# Altium PCB adc-breakout.PcbDoc
Units mil, origin at the board's own origin, x right, y up, seen from the top; angles counter-clockwise.
Board outline 2058.58 x 1965.67 mil, 2 copper layers (Top Layer, Bottom Layer), stack 65.792 mil thick; 49 components, 44 nets, 182 pads, 51 vias.
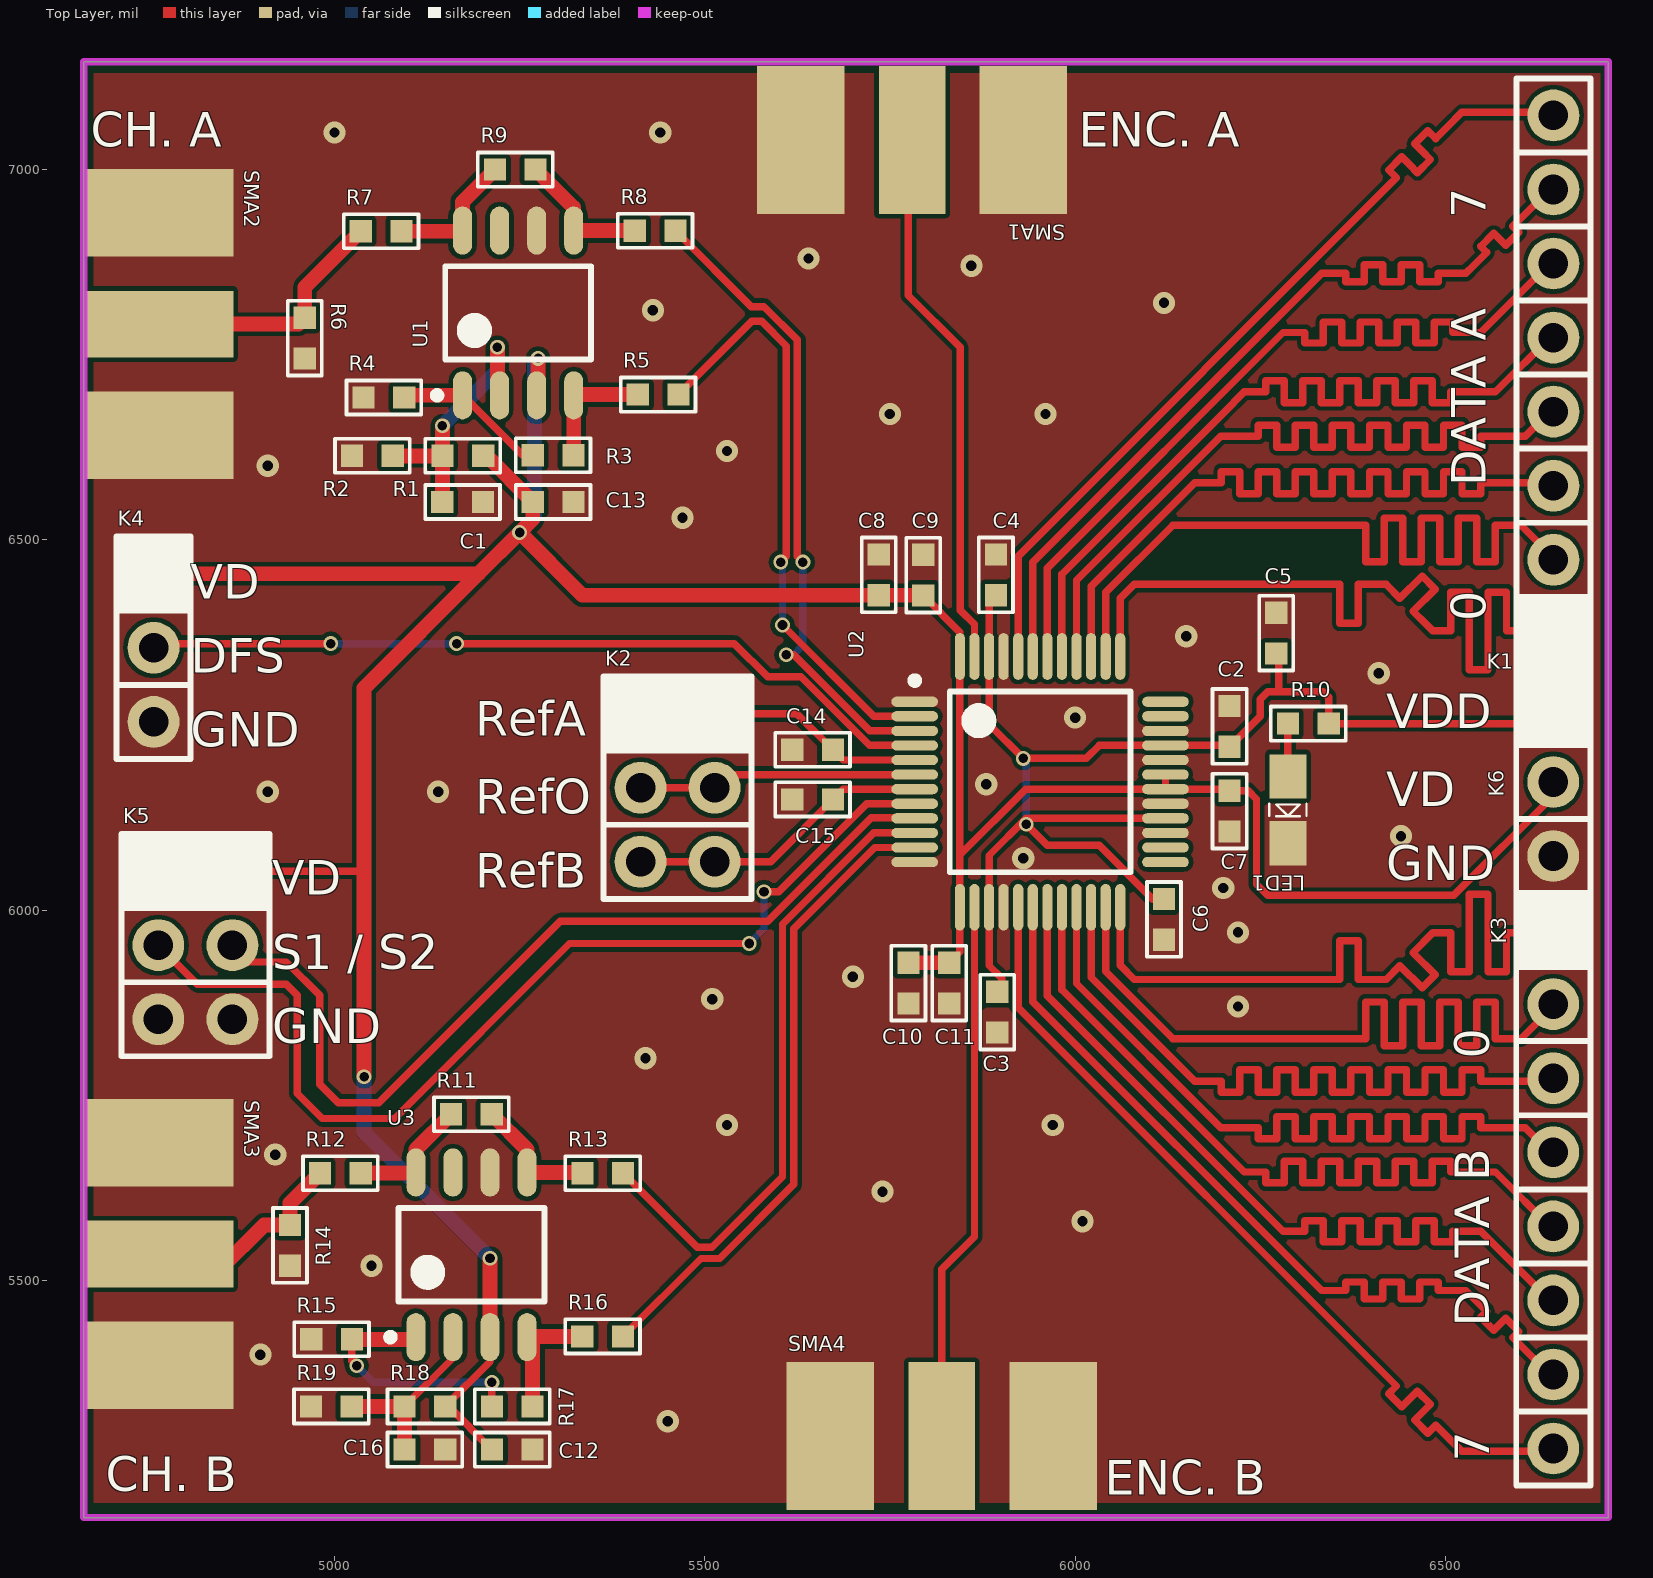
[diagram p0: Top Layer view]
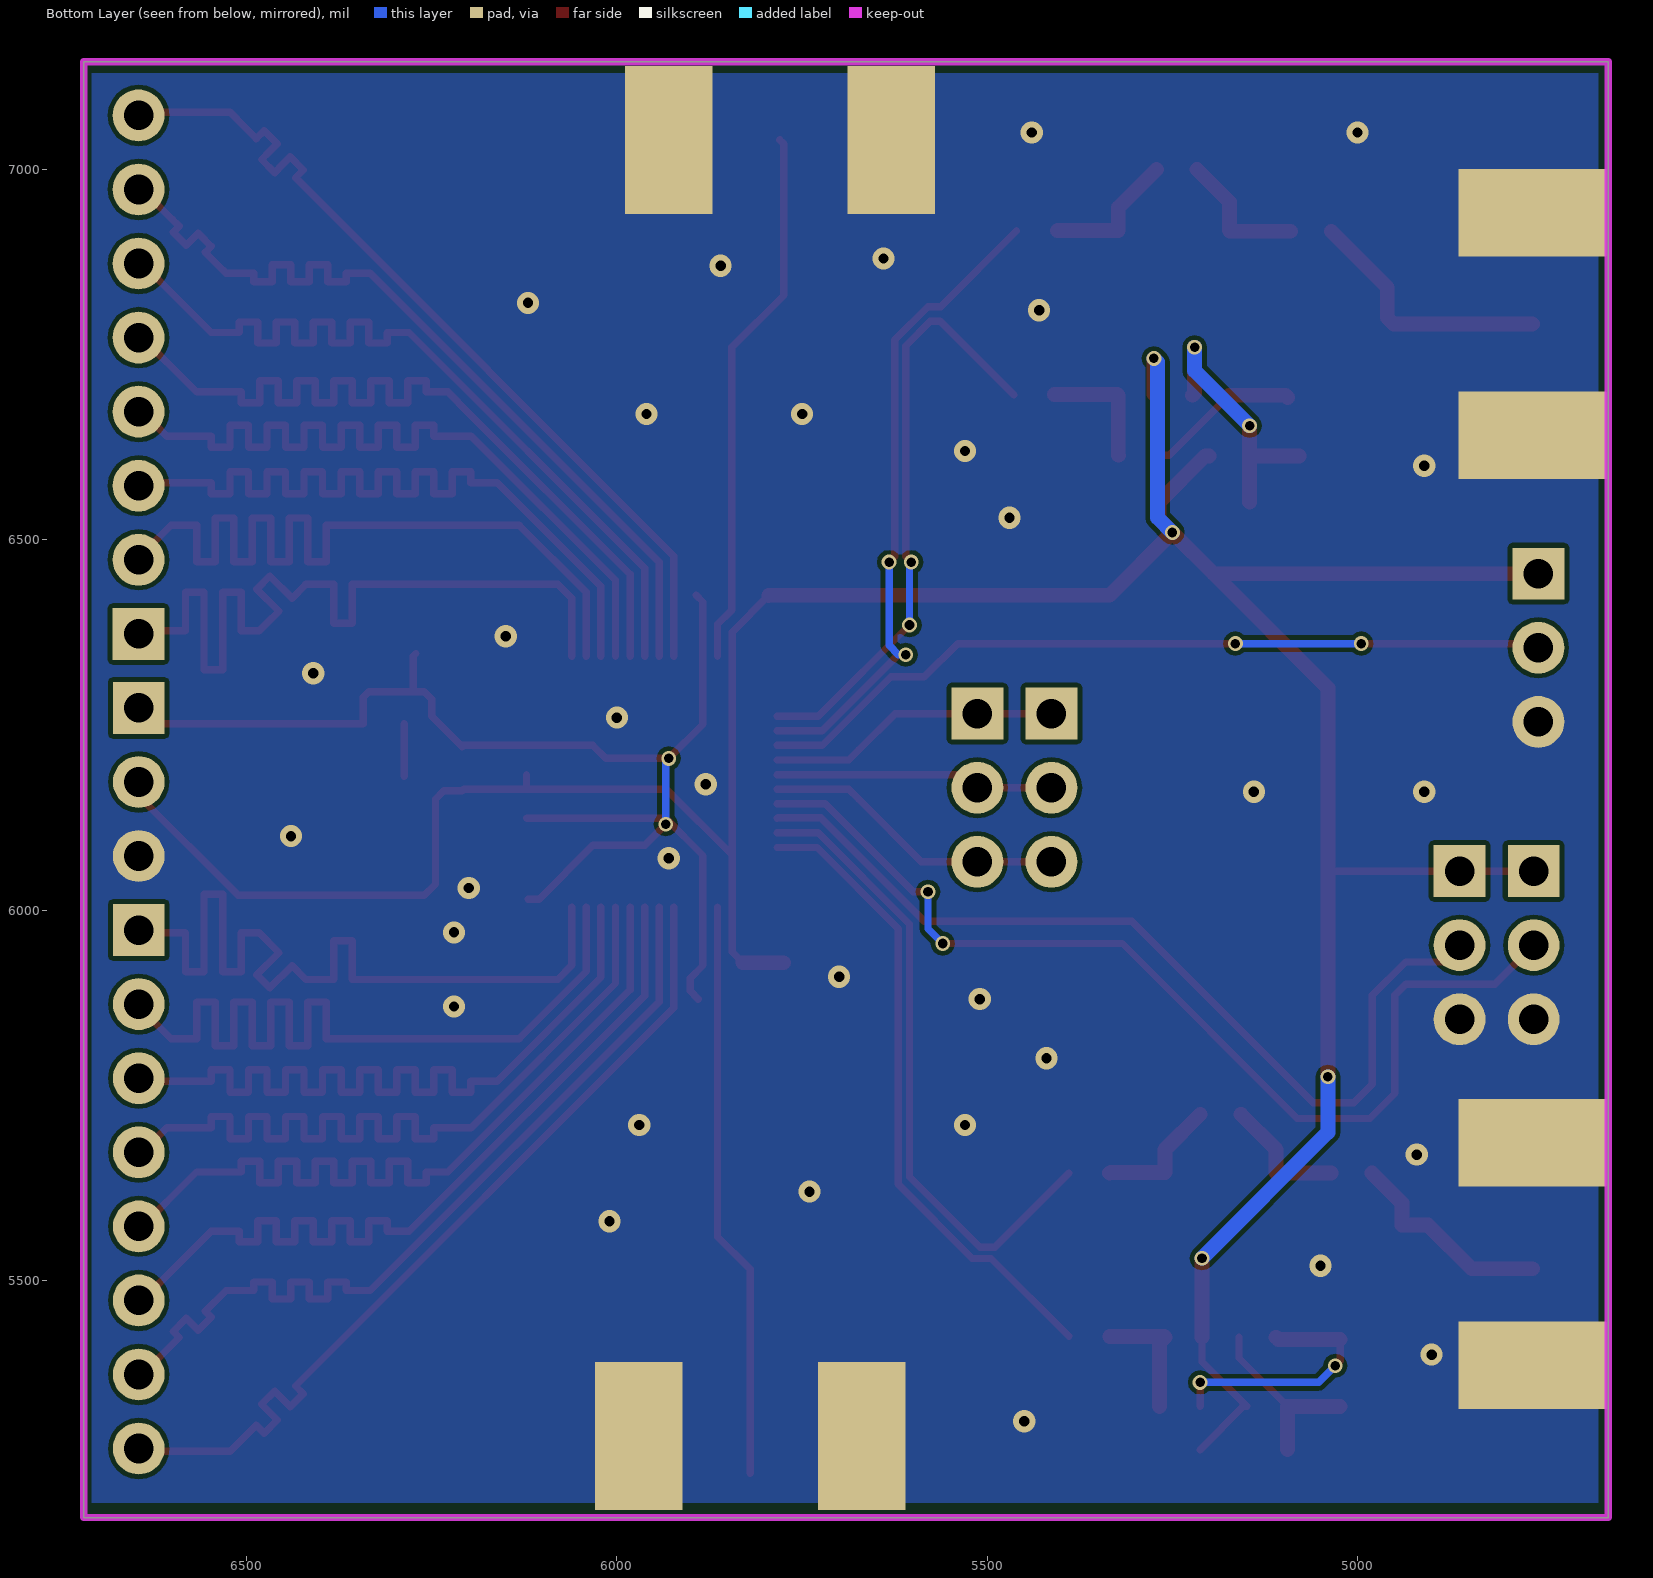
[diagram p1: Bottom Layer view, seen from below]

## Layer stack, top to bottom
Top Solder: solder mask 0.4, Solder Resist, Dk 3.5
Top Layer: signal copper 1.4
Dielectric 1: dielectric 62.9921, FR-4, Dk 4.8
Bottom Layer: signal copper 1.4
Bottom Solder: solder mask 0.4, Solder Resist, Dk 3.5

## Board outline
4661.42,5180 6720,5180 6720,7145.67 4661.42,7145.67

## Design rules (kind name [scope] priority, off if disabled: settings)
Clearance [All] p1: gap=6 ignorepadtopadclearanceinfootprint=FALSE except(0: Arc-Hole Track-Hole SMDPad-Hole THPad-Hole Via-Hole Fill-Hole Poly-Hole Region-Hole Text-Hole)
HoleSize [All] p1: absolutevalues=TRUE maxlimit=248.03 minlimit=39.37 maxpercent=80.000 minpercent=20.000
PlaneConnect [All] p1: planeconnectstyle=Direct reliefexpansion=20 reliefentries=4 reliefconductorwidth=10 reliefairgap=10
PolygonConnect [All] p1: connectstyle=Direct reliefconductorwidth=10 reliefentries=4 polygonreliefangle="90 Angle" airgapwidth=10
RoutingVias [All] p1: holewidth=13 width=20 viastyle="Through Hole" minholewidth=13 minwidth=20 maxholewidth=60 maxwidth=60
SolderMaskExpansion [All] p1: expansion=4
Width [All] p1: maxlimit=1000 minlimit=4 preferedwidth=10
28 further rules are at their usual default settings.

## Components (designator, comment, footprint, x,y, rotation, side; value= is the part's Value field where it differs from the comment)
C1 "100nF" 0603C-GENERIC 5145.67,6551.18 r0 top
C2 "1nF" 0603C-GENERIC 6208.66,6275.59 r270 top
C3 "1nF" 0603C-GENERIC 5895,5835 r90 top
C4 "1nF" 0603C-GENERIC 5893.07,6480.31 r270 top
C5 "1nF" 0603C-GENERIC 6271.65,6401.57 r270 top
C6 "1nF" 0603C-GENERIC 6120,5960 r90 top
C7 "1nF" 0603C-GENERIC 6208.66,6106.42 r90 top
C8 "1nF" 0603C-GENERIC 5735,6480.2 r270 top
C9 "1nF" 0603C-GENERIC 5795,6480 r270 top
C10 "1nF" 0603C-GENERIC 5774.96,5874.13 r90 top
C11 "1nF" 0603C-GENERIC 5830.08,5874.13 r90 top
C12 "100nF" 0603C-GENERIC 5212.6,5271.65 r0 top
C13 "100nF" 0603C-GENERIC 5267.83,6551.18 r0 top
C14 "100nF" 0603C-GENERIC 5618.23,6216.54 r0 top
C15 "100nF" 0603C-GENERIC 5618.23,6149.61 r0 top
C16 "100nF" 0603C-GENERIC 5094.61,5271.65 r0 top
K1 "HEADER-1X8" HEADER-1X8 6645.88,6373.11 r180 top
K2 "HEADER-2X3" HEADER-2X3 5413.39,6265.35 r0 top
K3 "HEADER-1X8" HEADER-1X8 6645.67,5973.11 r0 top
K4 "HEADER-1X3" HEADER-1X3 4755.91,6454.33 r0 top
K5 "HEADER-2X3" HEADER-2X3 4762.2,6052.76 r0 top
K6 "HEADER-1X3" HEADER-1X3 6645.67,6273.11 r0 top
LED1 "Green" "0805LED - GREEN" 6287.4,6135.55 r270 top
R1 "10K" 0603R-10K 5200.79,6613.46 r180 top
R2 "10K" 0603R-10K 5078.62,6613.46 r180 top
R3 "499R" 0603R-GENERIC 5267.83,6614.17 r0 top
R4 "523R" 0603R-GENERIC 5039.37,6692.2 r0 top
R5 "49R9" 0603R-GENERIC 5409.45,6696.14 r0 top
R6 "49R9" 0603R-GENERIC 4960,6800 r270 top
R7 "499R" 0603R-GENERIC 5035.55,6916.61 r0 top
R8 "49R9" 0603R-GENERIC 5405.51,6917.32 r0 top
R9 "499R" 0603R-GENERIC 5216.65,7000 r0 top
R10 "220R" 0603R-220 6342.4,6251.97 r180 top
R11 "499R" 0603R-GENERIC 5157.48,5724.41 r0 top
R12 "499R" 0603R-GENERIC 4980.43,5644.96 r0 top
R13 "49R9" 0603R-GENERIC 5334.76,5644.96 r0 top
R14 "49R9" 0603R-GENERIC 4940,5575 r270 top
R15 "523R" 0603R-GENERIC 4968.62,5420.55 r0 top
R16 "49R9" 0603R-GENERIC 5334.65,5424.49 r0 top
R17 "499R" 0603R-GENERIC 5212.6,5330 r0 top
R18 "10K" 0603R-10K 5149.61,5330 r180 top
R19 "10K" 0603R-10K 5023.5,5330 r180 top
SMA1 "*" MOLEX_SMA_EDGE 5610,7040 r270 top
SMA2 "*" MOLEX_SMA_EDGE 4763.78,6621.34 r0 top
SMA3 "*" MOLEX_SMA_EDGE 4763.78,5365.75 r0 top
SMA4 "*" MOLEX_SMA_EDGE 5990,5290 r90 top
U1 "AD8138" AD8138-SOIC8 5248.03,6806.38 r90 top
U2 "AD9288-(40/60/80)" ad9288-48QFP 5952.76,6173.23 r0 top
U3 "AD8138" AD8138-SOIC8 5185.04,5534.72 r90 top

## Footprints (in the part's own frame and the unit in brackets; to place one, negate y for a bottom-side part, rotate by r counter-clockwise, add the part's x,y. Pads: shape width x height; smd on the part's side, far side on the other; paste and mask are expansions set on the pad)
0603C-GENERIC [mil] "CAPACITOR 0603"
  rect 30x30 smd: 1(0,0) 2(55,0)
  silkscreen extent -23,-23 78,23, body extent -4,-15 59,15, height 19
0603R-10K [mil] "RESISTOR 0603"
  rect 30x30 smd: 1(0,0) 2(55,0)
  silkscreen extent -23,-23 78,23, body extent -4,-15 59,15, height 20
0603R-220 [mil] "RESISTOR 0603"
  rect 30x30 smd: 1(0,0) 2(55,0)
  silkscreen extent -23,-23 78,23, body extent -4,-15 59,15, height 20
0603R-GENERIC [mil] "RESISTOR 0603"
  rect 30x30 smd: 1(0,0) 2(55,0)
  silkscreen extent -23,-23 78,23, body extent -4,-15 59,15, height 19
"0805LED - GREEN" [mil]
  rect 60x50 smd: A(-45,0) K(45,0)
  silkscreen extent -8,-25 9,25, body extent -45,-25 41,25, height 24
AD8138-SOIC8 [mm] "SOIC, 8-Leads, Body 4.90x3.90mm, Pitch 1.27mm, IPC Low Density"
  oval 1.65x0.65 smd: 1(-2.825,1.905) 2(-2.825,0.635) 3(-2.825,-0.635) 4(-2.825,-1.905) 5(2.825,-1.905) 6(2.825,-0.635) 7(2.825,0.635) 8(2.825,1.905)
  silkscreen extent -2.95,-2.5 1.6,2.9, body extent -3,-2.5 3,2.5, height 1.35
ad9288-48QFP [mm] "TSQFP, 48-Leads, Body 7.00x7.00mm, Pitch 0.50mm, IPC Low Density"
  oval 1.6x0.35 smd: 1(-4.3,2.75) 2(-4.3,2.25) 3(-4.3,1.75) 4(-4.3,1.25) 5(-4.3,0.75) 6(-4.3,0.25) 7(-4.3,-0.25) 8(-4.3,-0.75) 9(-4.3,-1.25) 10(-4.3,-1.75) 11(-4.3,-2.25) 12(-4.3,-2.75) 25(4.3,-2.75) 26(4.3,-2.25) 27(4.3,-1.75) 28(4.3,-1.25) 29(4.3,-0.75) 30(4.3,-0.25) 31(4.3,0.25) 32(4.3,0.75) 33(4.3,1.25) 34(4.3,1.75) 35(4.3,2.25) 36(4.3,2.75)
  oval 0.35x1.6 smd: 13(-2.75,-4.3) 14(-2.25,-4.3) 15(-1.75,-4.3) 16(-1.25,-4.3) 17(-0.75,-4.3) 18(-0.25,-4.3) 19(0.25,-4.3) 20(0.75,-4.3) 21(1.25,-4.3) 22(1.75,-4.3) 23(2.25,-4.3) 24(2.75,-4.3) 37(2.75,4.3) 38(2.25,4.3) 39(1.75,4.3) 40(1.25,4.3) 41(0.75,4.3) 42(0.25,4.3) 43(-0.25,4.3) 44(-0.75,4.3) 45(-1.25,4.3) 46(-1.75,4.3) 47(-2.25,4.3) 48(-2.75,4.3)
  silkscreen extent -4.42,-3.1 3.1,3.6, body extent -4.5,-4.5 4.5,4.5, height 1.6
HEADER-1X3 [mil]
  rect 70x70 hole 40: 1(0,0)
  round 70 hole 40: 2(0,-100) 3(0,-200)
  silkscreen extent -50,-250 50,50, body extent -50,-250 50,50, height 470
HEADER-1X8 [mil]
  rect 70x70 hole 40: 1(0,0)
  round 70 hole 40: 2(0,-100) 3(0,-200) 4(0,-300) 5(0,-400) 6(0,-500) 7(0,-600) 8(0,-700)
  silkscreen extent -50,-750 50,50, body extent -50,-750 50,50, height 470
HEADER-2X3 [mil]
  rect 70x70 hole 40: 1(0,0) 2(100,0)
  round 70 hole 40: 3(0,-100) 4(100,-100) 5(0,-200) 6(100,-200)
  silkscreen extent -50,-250 150,50, body extent -50,-250 150,50, height 470
MOLEX_SMA_EDGE [mm]
  rect 5.08x2.286 smd: 1(0,4.318)
  rect 5.08x3 all layers, no hole: 2(0,8.136) 2(0,0.5)
  body extent -12.24,-0.44 2.03,9.08, height 4.32

## Part data
C1 C12 C13 C14 C15 C16: library part 0603C-100NF-25V-X7R-TDK, "CAPACITOR 0603 CERAMIC", Manufacturer="TDK Corporation", Manufacturer Part Number=C1608X7R1E104K, Supplier Part Number 1=445-1316-2-ND, Reel=C12, Supplier 1=Digi-Key
C2 C3 C4 C5 C6 C7 C8 C9 C10 C11: library part 0603C-1NF-50V-X7R, "CAPACITOR 0603 CERAMIC"
K1 K3 K4 K6: Supplier Part Number 1=S1011E-36-ND, Supplier 1=Digi-Key
K2 K5: Supplier Part Number 1=OR1081-ND, Supplier 1=Digi-Key
LED1: library part "0805 SMD LED - GREEN", Supplier Part Number 1=160-1426-1-ND, Supplier 1=Digi-Key
R1 R2 R18 R19: library part 0603R-10K, "GENERIC RESISTOR 0603", Case="0603 (1608 metric)", Manufacturer="Stackpole Electronics Inc", Manufacturer Part Number="RMCF 1/16 10K 1% R", Power (Watts)="0.1W, 1/10W", Resistance In Ohms=10.0K, Supplier Part Number=RMCF1/1610KFRDKR-ND, Supplier Part Number 1=RMCF0603FT10K0DKR-ND, Temperature Coefficient=±100ppm/°C, Tolerance=±1%, Category=Resistors, Composition="Thick Film", Lead Style="Surface Mount (SMD - SMT)", Packaging=Digi-Reel®, Reel=R21, RoHS="RoHS Compliant", Supplier=Digi-Key, Supplier 1=Digi-Key
R3 R4 R7 R9 R11 R12 R15 R17: library part 0603R-499R, "GENERIC RESISTOR 0603", Supplier Part Number 1=RNCP0603FTD499RTR-ND, Supplier 1=Digi-Key
R5 R6 R8 R13 R14 R16: library part 0603R-49R9, "GENERIC RESISTOR 0603", Supplier Part Number 1=RMCF0603FT49R9TR-ND, Supplier 1=Digi-Key
R10: library part 0603R-220, "GENERIC RESISTOR 0603", Case="0603 (1608 metric)", Manufacturer="Stackpole Electronics Inc", Manufacturer Part Number="RMCF 1/16 220 1% R", Power (Watts)="0.1W, 1/10W", Resistance In Ohms=220, Supplier Part Number=RMCF1/16220FRCT-ND, Temperature Coefficient=±100ppm/°C, Tolerance=±1%, Category=Resistors, Composition="Thick Film", Lead Style="Surface Mount (SMD - SMT)", Packaging="Cut Tape (CT)", RoHS="RoHS Compliant", Supplier=Digi-Key, Supplier 1=Digi-Key, Supplier Part Number 1=RMCF1/16220FRCT-ND
SMA1 SMA2 SMA3 SMA4: library part MOLEX_SMA_EDGE, Supplier Part Number 1=WM5534-ND, Supplier 1=Digi-Key
U1 U3: Supplier Part Number 1=AD8138ARZ-R7CT-ND, Supplier 1=Digi-Key
U2: library part AD9288, Supplier Part Number 1=AD9288BSTZ-40-ND, Supplier 1=Digi-Key

## Via types
v1: diameter 30, hole 14, Top Layer to Bottom Layer, tented both sides, 33 vias
v2: diameter 20, hole 13, Top Layer to Bottom Layer, tented both sides, 18 vias

## Nets (pads, with @x,y where several pads share a name; then routed paths per layer and width w, separated by ;. In a path a pad name is that pad's centre, name@x,y a point inside that pad or via, vN(x,y) a via of type N, cw(c..) or ccw(c..) an arc to the next point about the centre after c; other vN are vias at no path point)
DFS: K4.2 U2.4 | length 1086.9
  Top Layer w10: K4.2 4761.57,6360 v2(4995,6360) ; v2(5165,6360) 5540,6360 5585,6315 5630,6315 5722.56,6222.44 U2.4
  Bottom Layer w10: v2(4995,6360) v2(5165,6360)
GND: C1.2 C2.1 C3.1 C4.1 C5.1 C6.1 C7.1 C8.1 C9.1 C10.1 C11.1 C12.2 C13.2 C14.1 C15.1 C16.2 K4.3 K5.5 K5.6 K6.3 LED1.K R2.2 R4.1 R6.2 R14.2 R15.1 R19.2 SMA1.2 SMA2.2 SMA3.2 SMA4.2 U1.6 U2.1 U2.12 U2.16 U2.27 U2.29 U2.32 U2.34 U2.45 U3.6
  other v1: 5450,5310 4900,5400 5050,5520 6010,5580 5740,5620 4920,5670 5530,5710 5970,5710 5420,5800 6220,5870 5510,5880 5700,5910 6220,5970 6200,6030 5930,6070 6440,6100 4910,6160 5140,6160 5880,6170 6000,6260 6410,6320 6150,6370 5470,6530 4910,6600 5530,6620 5750,6670 5960,6670 5430,6810 6120,6820 5860,6870 5640,6880 5000,7050 5440,7050
NetC1_1: C1.1 R1.2 R2.1 U1.2 | length 372.9
  Top Layer w20: R2.1 R1.2 ; C1.1 5145.79,6551.3 R1.2 ; v2(5145.79,6654.21) R1.2 ; v2(5220,6760) 5220,6698.19 U1.2
  Bottom Layer w20: v2(5145.79,6654.21) 5220,6728.43 v2(5220,6760)
NetC16_1: C16.1 R18.2 R19.1 U3.2 | length 250.1
  Top Layer w10: R18.2 5160.04,5395.43 U3.2
  Top Layer w20: R19.1 R18.2 C16.1
NetK1_1: K1.1 U2.37 | length 1200
  Top Layer w10: U2.37 6061.02,6421.02 6080,6440 6260,6440 6357.5,6440 6357.5,6387.61 6382.5,6387.61 6382.5,6440 6407.5,6440 6420,6440 6420.96,6439.04 6438.64,6421.36 6468.55,6451.27 6486.23,6433.59 6456.32,6403.68 6474,6386 6482.83,6377.17 6507.5,6377.17 6507.5,6429.56 6532.5,6429.56 6532.5,6377.17 6532.5,6324.77 6557.5,6324.77 6557.5,6377.17 6557.5,6429.56 6582.5,6429.56 6582.5,6377.17 6607.5,6377.17 6620,6377.17 K1.1@6644.88,6377.17
NetK1_2: K1.2 U2.38 | length 1200
  Top Layer w10: U2.38 6041.34,6429.18 6132.16,6520 6140,6520 6392.5,6520 6392.5,6470.4 6417.5,6470.4 6417.5,6520 6417.5,6529.6 6442.5,6529.6 6442.5,6520 6442.5,6470.4 6467.5,6470.4 6467.5,6520 6467.5,6529.6 6492.5,6529.6 6492.5,6520 6492.5,6470.4 6517.5,6470.4 6517.5,6520 6517.5,6529.6 6542.5,6529.6 6542.5,6520 6542.5,6470.4 6567.5,6470.4 6567.5,6520 6580,6520 6602.05,6520 K1.2@6644.88,6477.17
NetK1_3: K1.3 U2.39 | length 1196
  Top Layer w10: U2.39 6021.65,6437.33 6160,6575.68 6161.49,6577.17 6172.5,6577.17 6197.5,6577.17 6197.5,6592.17 6222.5,6592.17 6222.5,6577.17 6222.5,6562.17 6247.5,6562.17 6247.5,6577.17 6247.5,6592.17 6272.5,6592.17 6272.5,6577.17 6272.5,6562.17 6297.5,6562.17 6297.5,6577.17 6297.5,6592.17 6322.5,6592.17 6322.5,6577.17 6322.5,6562.17 6347.5,6562.17 6347.5,6577.17 6347.5,6592.17 6372.5,6592.17 6372.5,6577.17 6372.5,6562.17 6397.5,6562.17 6397.5,6577.17 6397.5,6592.17 6422.5,6592.17 6422.5,6577.17 6422.5,6562.17 6447.5,6562.17 6447.5,6577.17 6447.5,6592.17 6472.5,6592.17 6472.5,6577.17 6472.5,6562.17 6497.5,6562.17 6497.5,6577.17 6497.5,6592.17 6522.5,6592.17 6522.5,6577.17 6522.5,6562.17 6547.5,6562.17 6547.5,6577.17 6560,6577.17 K1.3@6644.88,6577.17
NetK1_4: K1.4 U2.40 | length 1200
  Top Layer w10: U2.40 6001.97,6445.49 6196.48,6640 6200,6640 6247.5,6640 6247.5,6654.92 6272.5,6654.92 6272.5,6640 6272.5,6625.08 6297.5,6625.08 6297.5,6640 6297.5,6654.92 6322.5,6654.92 6322.5,6640 6322.5,6625.08 6347.5,6625.08 6347.5,6640 6347.5,6654.92 6372.5,6654.92 6372.5,6640 6372.5,6625.08 6397.5,6625.08 6397.5,6640 6397.5,6654.92 6422.5,6654.92 6422.5,6640 6422.5,6625.08 6447.5,6625.08 6447.5,6640 6447.5,6654.92 6472.5,6654.92 6472.5,6640 6472.5,6625.08 6497.5,6625.08 6497.5,6640 6497.5,6654.92 6522.5,6654.92 6522.5,6640 6522.5,6625.08 6547.5,6625.08 6547.5,6640 6560,6640 6607.72,6640 K1.4@6644.88,6677.17
NetK1_5: K1.5 U2.41 | length 1200
  Top Layer w10: U2.41 5982.28,6453.64 6208.64,6680 6219.81,6691.16 6228.64,6700 6257.5,6700 6257.5,6714.61 6282.5,6714.61 6282.5,6700 6282.5,6685.39 6307.5,6685.39 6307.5,6700 6307.5,6714.61 6332.5,6714.61 6332.5,6700 6332.5,6685.39 6357.5,6685.39 6357.5,6700 6357.5,6714.61 6382.5,6714.61 6382.5,6700 6382.5,6685.39 6407.5,6685.39 6407.5,6700 6407.5,6714.61 6432.5,6714.61 6432.5,6700 6432.5,6685.39 6457.5,6685.39 6457.5,6700 6457.5,6714.61 6482.5,6714.61 6482.5,6700 6482.5,6685.39 6507.5,6685.39 6507.5,6700 6520,6700 6567.72,6700 K1.5@6644.88,6777.17
NetK1_6: K1.6 U2.42 | length 1200
  Top Layer w10: U2.42 5962.6,6461.79 6280.81,6780 6310.22,6780 6310.22,6765.85 6335.22,6765.85 6335.22,6780 6335.22,6794.15 6360.22,6794.15 6360.22,6780 6360.22,6765.85 6385.22,6765.85 6385.22,6780 6385.22,6794.15 6410.22,6794.15 6410.22,6780 6410.22,6765.85 6435.22,6765.85 6435.22,6780 6435.22,6794.15 6460.22,6794.15 6460.22,6780 6460.22,6765.85 6485.22,6765.85 6485.22,6780 6485.22,6794.15 6510.22,6794.15 6510.22,6780 6535.22,6780 6547.72,6780 6558.88,6791.16 6567.72,6800 K1.6@6644.88,6877.17
NetK1_7: K1.7 U2.43 | length 1200
  Top Layer w10: U2.43 5942.91,6469.95 6332.97,6860 6365.22,6860 6365.22,6848.54 6390.22,6848.54 6390.22,6860 6390.22,6871.46 6415.22,6871.46 6415.22,6860 6415.22,6848.54 6440.22,6848.54 6440.22,6860 6440.22,6871.46 6465.22,6871.46 6465.22,6860 6465.22,6848.54 6490.22,6848.54 6490.22,6860 6515.22,6860 6527.72,6860 6538.13,6870.41 6555.81,6888.09 6547.7,6896.2 6565.38,6913.87 6573.48,6905.77 6581.59,6897.66 6599.27,6915.34 6591.16,6923.45 6600,6932.28 K1.7@6644.88,6977.17
NetK1_8: K1.8 U2.44 | length 1195.4
  Top Layer w10: U2.44 5923.23,6478.1 6425.13,6980 6433.97,6988.84 6423.36,6999.45 6441.04,7017.12 6451.64,7006.52 6462.25,6995.91 6479.93,7013.59 6469.32,7024.19 6458.72,7034.8 6476.39,7052.48 6487,7041.87 6502.56,7057.44 6522.29,7077.17 K1.8@6644.88,7077.17
NetK3_1: K3.1 U2.24 | length 1200
  Top Layer w10: U2.24 6061.02,5925.43 6080,5906.46 6357.5,5906.46 6357.5,5958.85 6382.5,5958.85 6382.5,5906.46 6420,5906.46 6438.64,5925.1 6468.55,5895.19 6486.23,5912.87 6456.32,5942.77 6482.83,5969.29 6507.5,5969.29 6507.5,5916.9 6532.5,5916.9 6532.5,6021.69 6557.5,6021.69 6557.5,5916.9 6582.5,5916.9 6582.5,5969.29 K3.1@6644.88,5969.29
NetK3_2: K3.2 U2.23 | length 1200
  Top Layer w10: U2.23 6041.34,5917.28 6132.16,5826.46 6392.5,5826.46 6392.5,5876.06 6417.5,5876.06 6417.5,5816.85 6442.5,5816.85 6442.5,5876.06 6467.5,5876.06 6467.5,5816.85 6492.5,5816.85 6492.5,5876.06 6517.5,5876.06 6517.5,5816.85 6542.5,5816.85 6542.5,5876.06 6567.5,5876.06 6567.5,5826.46 6602.05,5826.46 K3.2@6644.88,5869.29
NetK3_3: K3.3 U2.22 | length 1196
  Top Layer w10: U2.22 6021.65,5909.13 6161.49,5769.29 6197.5,5769.29 6197.5,5754.29 6222.5,5754.29 6222.5,5784.29 6247.5,5784.29 6247.5,5754.29 6272.5,5754.29 6272.5,5784.29 6297.5,5784.29 6297.5,5754.29 6322.5,5754.29 6322.5,5784.29 6347.5,5784.29 6347.5,5754.29 6372.5,5754.29 6372.5,5784.29 6397.5,5784.29 6397.5,5754.29 6422.5,5754.29 6422.5,5784.29 6447.5,5784.29 6447.5,5754.29 6472.5,5754.29 6472.5,5784.29 6497.5,5784.29 6497.5,5754.29 6522.5,5754.29 6522.5,5784.29 6547.5,5784.29 6547.5,5769.29 K3.3@6644.88,5769.29
NetK3_4: K3.4 U2.21 | length 1200
  Top Layer w10: U2.21 6001.97,5900.97 6196.48,5706.46 6247.5,5706.46 6247.5,5691.53 6272.5,5691.53 6272.5,5721.38 6297.5,5721.38 6297.5,5691.53 6322.5,5691.53 6322.5,5721.38 6347.5,5721.38 6347.5,5691.53 6372.5,5691.53 6372.5,5721.38 6397.5,5721.38 6397.5,5691.53 6422.5,5691.53 6422.5,5721.38 6447.5,5721.38 6447.5,5691.53 6472.5,5691.53 6472.5,5721.38 6497.5,5721.38 6497.5,5691.53 6522.5,5691.53 6522.5,5721.38 6547.5,5721.38 6547.5,5706.46 6607.72,5706.46 K3.4@6644.88,5669.29
NetK3_5: K3.5 U2.20 | length 1200
  Top Layer w10: U2.20 5982.28,5892.82 6228.64,5646.46 6257.5,5646.46 6257.5,5631.84 6282.5,5631.84 6282.5,5661.07 6307.5,5661.07 6307.5,5631.84 6332.5,5631.84 6332.5,5661.07 6357.5,5661.07 6357.5,5631.84 6382.5,5631.84 6382.5,5661.07 6407.5,5661.07 6407.5,5631.84 6432.5,5631.84 6432.5,5661.07 6457.5,5661.07 6457.5,5631.84 6482.5,5631.84 6482.5,5661.07 6507.5,5661.07 6507.5,5646.46 6567.72,5646.46 K3.5@6644.88,5569.29
NetK3_6: K3.6 U2.19 | length 1200
  Top Layer w10: U2.19 5962.6,5884.66 6280.81,5566.46 6310.22,5566.46 6310.22,5580.61 6335.22,5580.61 6335.22,5552.31 6360.22,5552.31 6360.22,5580.61 6385.22,5580.61 6385.22,5552.31 6410.22,5552.31 6410.22,5580.61 6435.22,5580.61 6435.22,5552.31 6460.22,5552.31 6460.22,5580.61 6485.22,5580.61 6485.22,5552.31 6510.22,5552.31 6510.22,5566.46 6547.72,5566.46 K3.6@6644.88,5469.29
NetK3_7: K3.7 U2.18 | length 1200
  Top Layer w10: U2.18 5942.91,5876.51 6332.97,5486.46 6365.22,5486.46 6365.22,5497.92 6390.22,5497.92 6390.22,5474.99 6415.22,5474.99 6415.22,5497.92 6440.22,5497.92 6440.22,5474.99 6465.22,5474.99 6465.22,5497.92 6490.22,5497.92 6490.22,5486.46 6527.72,5486.46 6555.81,5458.37 6547.7,5450.26 6565.38,5432.58 6581.59,5448.8 6599.27,5431.12 6591.16,5423.01 K3.7@6644.88,5369.29
NetK3_8: K3.8 U2.17 | length 1195.4
  Top Layer w10: U2.17 5923.23,5868.36 6433.97,5357.62 6423.36,5347.01 6441.04,5329.33 6462.25,5350.55 6479.93,5332.87 6458.72,5311.66 6476.39,5293.98 6487,5304.58 6522.29,5269.29 K3.8@6644.88,5269.29
NetLED1_A: LED1.A R10.2 | length 71.4
  Top Layer w10: LED1.A R10.2
NetR3_1: R3.1 R4.2 U1.1 | length 208.2
  Top Layer w10: U1.1 5254.02,6614.17 R3.1
  Top Layer w20: R4.2 5097.32,6695.16 U1.1
NetR3_2: R3.2 R5.1 U1.4 | length 167.9
  Top Layer w20: R3.2 5323.03,6614.37 U1.4 5324.02,6696.14 R5.1
NetR5_2: R5.2 U2.2 | length 810.7
  Top Layer w10: R5.2 5563.31,6795 5576.77,6795 5610,6761.77 5610,6477.5 v2(5602.5,6470) ; v2(5605,6385) 5728.19,6261.81 U2.2
  Bottom Layer w10: v2(5602.5,6470) 5605,6467.5 v2(5605,6385)
NetR6_1: R6.1 R7.1 SMA2.1 | length 347.7
  Top Layer w20: SMA2.1 4951.34,6791.34 R6.1 4960,6841.06 R7.1
NetR7_2: R7.2 R9.1 U1.8 | length 183.4
  Top Layer w20: R7.2 5172.05,6916.61 U1.8 5173.03,6956.38 R9.1
NetR8_1: R8.1 R9.2 U1.5 | length 186.3
  Top Layer w20: R9.2 5323.03,6948.62 U1.5 5405.24,6917.6 R8.1
NetR8_2: R8.2 U2.3 | length 884.9
  Top Layer w10: R8.2 5562.83,6815 5580,6815 5625,6770 5625,6477.5 v2(5632.5,6470) ; v2(5610,6345) 5620,6345 5722.87,6242.13 U2.3
  Bottom Layer w10: v2(5610,6345) 5620,6345 5632.5,6357.5 v2(5632.5,6470)
NetR11_1: R11.1 R12.2 U3.8 | length 173.1
  Top Layer w20: R12.2 5109.06,5644.96 U3.8 5110.04,5676.97 R11.1
NetR11_2: R11.2 R13.1 U3.5 | length 173.3
  Top Layer w20: R11.2 5260.04,5676.85 U3.5 5333.78,5645.94 R13.1
NetR12_1: R12.1 R14.1 SMA3.1 | length 287.5
  Top Layer w20: SMA3.1@4763.78,5515.75 4845.75,5515.75 4905,5575 R14.1 4940,5604.53 R12.1
NetR13_2: R13.2 U2.10 | length 866.9
  Top Layer w10: R13.2 5490,5544.72 5509.72,5544.72 5605,5640 5605,5981.21 5728.12,6104.33 U2.10
NetR15_2: R15.2 R17.1 U3.1 | length 350.2
  Top Layer w10: R15.2 5023.62,5391.38 v2(5030,5385) ; R17.1 v2(5212.6,5362.4)
  Top Layer w20: R15.2 5107.09,5420.55 U3.1
  Bottom Layer w10: v2(5030,5385) 5052.6,5362.4 v2(5212.6,5362.4)
NetR16_1: R16.1 R17.2 U3.4 | length 171.6
  Top Layer w20: R17.2 5267.6,5415.94 U3.4 5261.02,5424.49 R16.1
NetR16_2: R16.2 U2.11 | length 869.5
  Top Layer w10: R16.2 5494.88,5529.72 5520,5529.72 5620,5629.72 5620,5975 5729.65,6084.65 U2.11
NetSMA1_1: SMA1.1 U2.47 | length 736.5
  Top Layer w10: SMA1.1 5775,7035 5775,6830 5845,6760 5845,6405 5864.17,6385.83 U2.47
NetSMA4_1: SMA4.1 U2.14 | length 782.2
  Top Layer w10: SMA4.1@5820,5240 SMA4.1 5820,5515 5864.17,5559.17 U2.14
REFA: C14.2 K2.1 K2.2 U2.5 | length 396
  Top Layer w10: K2.1 K2.2 5624.41,6265.35 C14.2 5687.01,6202.76 U2.5
REFB: C15.2 K2.5 K2.6 U2.7 | length 410.7
  Top Layer w10: K2.5 K2.6 5588.98,6065.35 C15.2 5687.01,6163.39 U2.7
REFO: K2.3 K2.4 U2.6 | length 377.4
  Top Layer w10: K2.3 K2.4 5531.1,6183.07 U2.6
S1: K5.3 U2.8 | length 1401
  Top Layer w10: K5.3 4814.96,5900 4935,5900 4950,5885 4950,5752.57 4983.79,5718.79 5081.21,5718.79 5317.43,5955 v2(5560,5955) ; v2(5580,6025) 5600,6025 5718.7,6143.7 U2.8
  Bottom Layer w10: v2(5560,5955) 5580,5975 v2(5580,6025)
S2: K5.4 U2.9 | length 1239.6
  Top Layer w10: K5.4 4884.96,5930 4935,5930 4980,5885 4980,5765 5005,5740 5060,5740 5305,5985 5585,5985 5725,6125 5782.48,6125 U2.9
VD: C7.2 C8.2 C9.2 C10.2 C11.2 C12.1 C13.1 K4.1 K5.1 K5.2 K6.2 R1.1 R18.1 U1.3 U2.13 U2.30 U2.31 U2.48 U3.3 | length 4801
  Top Layer w10: K5.1 K5.2 5037.24,6052.76 5040,6050 ; U3.3 5210.04,5390.43 R18.1 5154.25,5330 C12.1 ; C9.2 5844.49,6375.51 U2.48 5844.49,6074.49 ; C11.2 5844.49,5943.54 U2.13 5844.49,6074.49 ; U2.31 U2.30 ; K6.2@6644.88,6153.54 6511.34,6020 6260,6020 6245,6035 6245,6150 6233.58,6161.42 C7.2 6206.69,6163.39 U2.30 ; 5844.49,6074.49 5933.39,6163.39 U2.30
  Top Layer w20: K4.1 5194.33,6454.33 ; v2(5040,5775) 5040,6050 5040,6300 5194.33,6454.33 ; R1.1 5205.55,6613.46 C13.1 5267.83,6527.83 v2(5250,6510) ; U3.3 v2(5210.04,5529.96) ; U1.3 5275,6697.13 v2(5275,6745) ; C10.2 C11.2 ; C9.2 5794.8,6425.2 C8.2 5334.8,6425.2 v2(5250,6510) ; 5194.33,6454.33 v2(5250,6510)
  Bottom Layer w20: v2(5040,5775) 5040,5700 v2(5210.04,5529.96) ; v2(5250,6510) 5270,6530 5270,6740 v2(5275,6745)
VDD: C2.2 C3.2 C4.2 C5.2 C6.2 K6.1 R10.1 U2.15 U2.28 U2.33 U2.46 | length 1893.9
  Top Layer w10: C3.2@5890,5880 5901.22,5891.22 5901.22,5908 5883.86,5925.35 U2.15 5883.86,6073.86 v2@5934.02,6124.02 ; C4.2 5883.86,6416.1 U2.46 5883.86,6251.14 v2(5930,6205) 6015,6205 6032.44,6222.44 U2.33 6206.81,6222.44 C2.2 6250,6261.93 6250,6285 6260,6295 6275,6295 ; C6.2 6105,6015 6032.5,6087.5 5962.5,6087.5 v2(5934.02,6115.98) v2@5934.02,6124.02 ; U2.28 v2@5934.02,6124.02 ; C5.2 6275,6343.23 6275,6295 ; K6.1@6644.88,6253.54 6643.31,6251.97 R10.1 6342.4,6287.6 6335,6295 6275,6295
  Bottom Layer w10: v2(5930,6205) 5934.02,6200.98 v2(5934.02,6115.98)
pads on no net: U1.7 U2.25 U2.26 U2.35 U2.36 U3.7

## Polygon pours and split planes (outlines as drawn)
GND on Bottom Layer "Bottom Layer-No Net" (solid, remove dead copper, pour order 0): 4675,7130 4675,5200 6710,5200 6710,7130
GND on Top Layer "Bottom Layer-No Net" (solid, remove dead copper, pour order 2): 4675,7130 4675,5200 6710,5200 6710,7130

## Keep-outs
Keep-Out Layer:
  the board outline again, w10

## Silkscreen, mask and mechanical layers (free items; w line width, h text height)
Top Overlay:
  text "CH. A" at 4670.91,7015 h80
  text "ENC. A" at 6005,7015 h80
  text "VD" at 4805.91,6405 h80
  text "0       DATA A      7" at 6570,6390 h80 r90
  text "DFS" at 4805.91,6305 h80
  text "VDD" at 6420,6230 h80
  text "RefA" at 5190,6220 h80
  text "GND" at 4805.91,6205 h80
  text "VD" at 6420,6125 h80
  text "RefO" at 5190,6115 h80
  text "GND" at 6420,6025 h80
  text "RefB" at 5190,6015 h80
  text "VD" at 4915.91,6005 h80
  text "S1 / S2" at 4915.91,5905 h80
  text "GND" at 4915.91,5805 h80
  text "7       DATA B      0" at 6575,5255 h80 r90
  text "CH. B" at 4690.91,5200 h80
  text "ENC. B" at 6040,5195 h80
Bottom Solder:
  text "sebholzapfel.com" at 6142.83,5702.28 h80
  text "AD9288" at 6088.7,5576.3 h118.11
  text "ADC BREAKOUT" at 6190,5490 h100